# EAGLE board sx1509-breakout_mount (EAGLE 9.1.3)
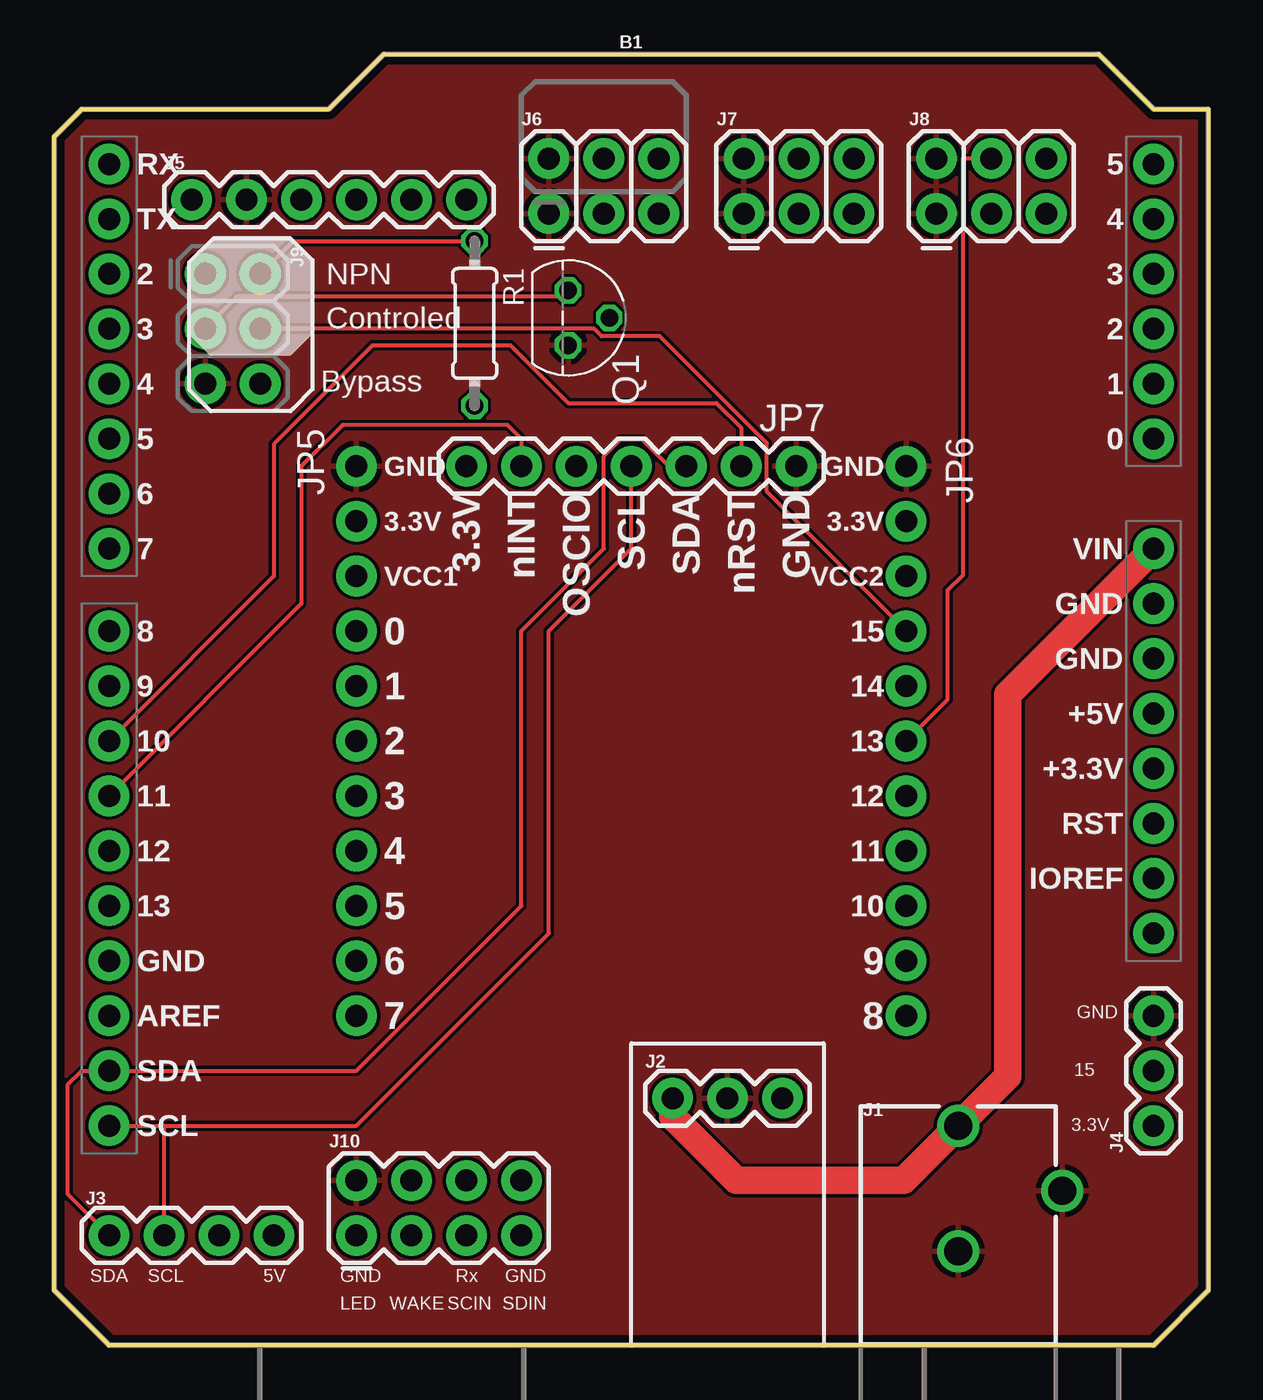
[diagram p0: board, top side]
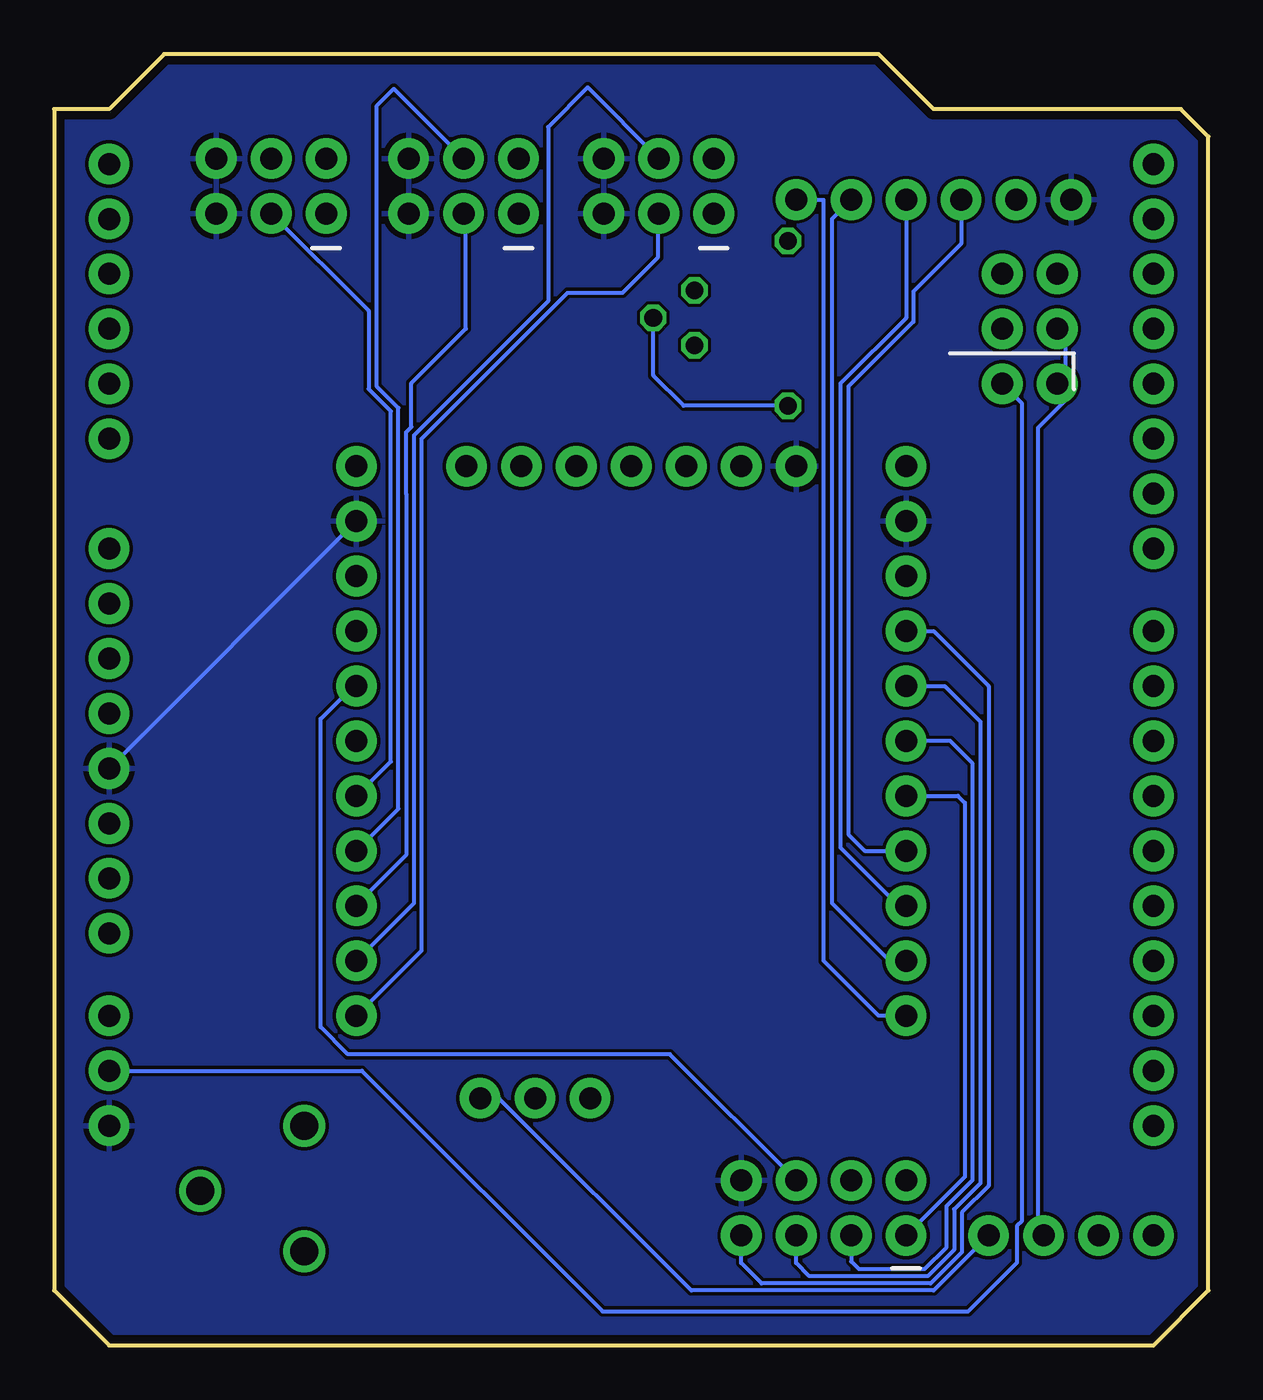
[diagram p1: board, bottom side, seen from below]

Size 53.34 x 59.69 mm. Coordinates in mm from the lower left corner, seen from the top.
Outline: 0,2.54 0,55.88 1.27,57.15 12.7,57.15 15.24,59.69 48.26,59.69 50.8,57.15 53.34,57.15 53.34,2.54 50.8,0 2.54,0 0,2.54
Copper layers (1*16): Top 0.035559375mm / dielectric 1.6mm / Bottom 0.035559375mm
Design rules "oshpark-2layer": minimum track width 6mil, minimum drill 10mil, track to track 6mil, track to pad 6mil, pad to pad 6mil, via to via 6mil, smd to smd 6mil, copper to edge 15mil, drill to drill 6mil, minimum pad ring 5mil, minimum via ring 5mil, stop-mask expansion 2.5mil, vias tented up to drill 0mil, thermal gap 10mil

## Footprints (pad centres in the part's own frame; a part is rotated, then mirrored left to right if it is on the bottom)
UNO_R3_SHIELD = drill 1.016 pad 1.88: 3.3V 24.13,-2.54; 5V 24.13,0; A0 24.13,12.7; A1 24.13,15.24; A2 24.13,17.78; A3 24.13,20.32; A4 24.13,22.86; A5 24.13,25.4; AREF -24.13,-13.97; D2 -24.13,20.32; D3 -24.13,17.78; D4 -24.13,15.24; D5 -24.13,12.7; D6 -24.13,10.16; D7 -24.13,7.62; D8 -24.13,3.81; D9 -24.13,1.27; D10 -24.13,-1.27; D11 -24.13,-3.81; D12 -24.13,-6.35; D13 -24.13,-8.89; GND@0 24.13,2.54; GND@1 24.13,5.08; GND@2 -24.13,-11.43; IOREF 24.13,-7.62; NC 24.13,-10.16; RES 24.13,-5.08; RX -24.13,25.4; SCL -24.13,-19.05; SDA -24.13,-16.51; TX -24.13,22.86; VIN 24.13,7.62
POWER_JACK_PTH_BREAD = drill 1.3: GND 0,7.9; GNDBREAK 4.8,10.7; PWR 0,13.7
1X03 = drill 1.016 pad 1.88: 1 0,0; 2 2.54,0; 3 5.08,0
1X04 = drill 1.016 pad 1.88: 1 0,0; 2 2.54,0; 3 5.08,0; 4 7.62,0
1X06 = drill 1.016 pad 1.88: 1 0,0; 2 2.54,0; 3 5.08,0; 4 7.62,0; 5 10.16,0; 6 12.7,0
2X3 = drill 1.016 pad 1.88: 1 0,0; 2 0,2.54; 3 2.54,0; 4 2.54,2.54; 5 5.08,0; 6 5.08,2.54
2X3-NS = drill 1.016 pad 1.88: 1 -2.54,-1.27; 2 -2.54,1.27; 3 0,-1.27; 4 0,1.27; 5 2.54,-1.27; 6 2.54,1.27
2X4 = drill 1.016 pad 1.88: 1 -3.81,-1.27; 2 -3.81,1.27; 3 -1.27,-1.27; 4 -1.27,1.27; 5 1.27,-1.27; 6 1.27,1.27; 7 3.81,-1.27; 8 3.81,1.27
1X11_NO_SILK = drill 1.016 pad 1.88: 1 0,0; 2 2.54,0; 3 5.08,0; 4 7.62,0; 5 10.16,0; 6 12.7,0; 7 15.24,0; 8 17.78,0; 9 20.32,0; 10 22.86,0; 11 25.4,0
1X07 = drill 1.016 pad 1.88: 1 0,0; 2 2.54,0; 3 5.08,0; 4 7.62,0; 5 10.16,0; 6 12.7,0; 7 15.24,0
TO92 = drill 0.813 octagon: 1 1.27,0; 2 0,1.905; 3 -1.27,0
0204/7 = drill 0.813 octagon: 1 -3.81,0; 2 3.81,0

## Placement (x,y rotation side)
B1  ARDUINO_UNO_R3_SHIELDBASIC  [UNO_R3_SHIELD]  26.67,29.21 0 top
J1  Pi Power Jack  [POWER_JACK_PTH_BREAD]  41.78,-3.56 0 top
J2  12V to 5V  [1X03]  28.57,11.43 0 top
J3  Pi Connection  [1X04]  10.16,5.08 180 top
J4  [1X03]  50.8,10.16 90 top
J5  IR Sensors  [1X06]  6.35,52.96 0 top
J6  Switch A + B  [2X3]  22.86,52.32 0 top
J7  Switch C + D  [2X3]  31.88,52.32 0 top
J8  Switch E + F  [2X3]  40.77,52.32 0 top
J9  [2X3-NS]  8.26,46.99 270 top
J10  LED + Radio  [2X4]  17.78,6.35 0 top
JP5  [1X11_NO_SILK]  13.97,40.64 270 top
JP6  [1X11_NO_SILK]  39.37,40.64 270 top
JP7  [1X07]  34.29,40.64 180 top
Q1  BC337  [TO92]  23.75,47.5 270 top
R1  100  [0204/7]  19.43,47.24 270 top

## Library data of the parts
B1 = SparkFun-Boards
J1 = SparkFun-Connectors; PROD_ID: PRT-10811
J2 J4 J9 J10 JP5-JP7 = SparkFun-Connectors
J3 = SparkFun-Connectors; PROD_ID: CONN-09696
J5 = SparkFun-Connectors; PROD_ID: CONN-08437
J6-J8 = SparkFun-Connectors; PROD_ID: CONN-11566
Q1 = transistor-npn
R1 = eagle-ltspice; SPICEMODEL: NONE; SPICEPREFIX: R

## Nets
3.3V: B1.3.3V J4.1 J5.1 J6.5 J6.6 J7.5 J7.6 J8.5 J8.6 J10.8 JP5.2 JP6.2 JP7.7
4: J5.3 JP5.8
5: J5.4 JP5.9
5V: J2.3 J3.1
6: J5.5 JP5.10
7: J5.6 JP5.11
8: J6.3 JP6.11
9: J6.4 JP6.10
10: J7.3 JP6.9
11: J7.4 JP6.8
12: J8.3 JP6.7
12V: B1.VIN J1.PWR J2.1
13: J8.4 JP6.6
15: J9.4 JP6.4
GND: J1.GND J1.GNDBREAK J2.2 J4.3 J5.2 J6.1 J6.2 J7.1 J7.2 J8.1 J8.2 J9.5 J10.2 JP5.1 JP6.1 JP7.1 Q1.1
N$1: J3.2 J9.3 Q1.3
N$2: Q1.2 R1.2
N$3: J4.2 J9.6
N$4: J9.2 R1.1
NINT: B1.D11 JP7.6
NRESET: B1.D10 JP7.2
OSCIO: JP7.5
RXDATA: J10.6 JP6.5
SCIN: J10.5 JP5.5
SCL: B1.SCL J3.3 JP7.4
SDA: B1.SDA J3.4 JP7.3
SDIN: J10.7 JP5.4
VCC1: JP5.3
VCC2: JP6.3
WAKE_LED: J10.1 JP5.7
WAKE_SW: J10.3 JP5.6

## Tracks (layer width: path | path; a pad name or v marks a point on that pad's centre or on a via)
3.3V
  Bottom 0.178: B1.3.3V JP6.2
  pour Bottom: 0,55.88 1.27,57.15 12.7,57.15 15.24,59.69 48.26,59.69 50.8,57.15 53.34,57.15 53.34,2.54 50.8,0 2.54,0 0,2.54
4
  Bottom 0.178: J5.3 11.43,50.93 13.64,48.72 13.64,47.32 16.64,44.32 16.64,23.62 15.88,22.86 JP5.8
5
  Bottom 0.178: JP5.9 14.31,20.32 16.99,23 16.99,44.47 13.97,47.49 J5.4
5V
  Bottom 0.178: J3.1 12.7,2.54 23.89,2.54 32.78,11.43 J2.3
6
  Bottom 0.178: J5.5 17.4,52.07 17.4,20.45 14.73,17.78 JP5.10
7
  Bottom 0.178: JP5.11 15.24,15.24 17.78,17.78 17.78,52.96 J5.6
8
  Bottom 0.178: J6.3 25.43,52.3 25.43,50.3 27.07,48.66 29.61,48.66 36.36,41.91 36.36,18.25 JP6.11
9
  Bottom 0.178: JP6.10 36.72,20.43 36.72,42.06 30.52,48.26 30.52,56.31 28.68,58.15 J6.4
10
  Bottom 0.178: J7.3 34.31,52.22 34.31,46.99 36.83,44.48 36.83,42.45 37.07,42.21 37.07,40.27 37.07,39.37 37.07,22.67 39.37,20.37 JP6.9
11
  Bottom 0.178: JP6.8 37.43,24.8 37.43,43.33 38.45,44.35 38.45,57.27 37.64,58.09 J7.4
12
  Bottom 0.178: JP6.7 37.78,26.99 37.78,43.18 38.81,44.2 38.81,47.82 J8.3
12V
  Top 1.27: J2.1 28.57,10.56 31.51,7.62 39.26,7.62 J1.PWR 44.07,12.43 44.07,30.1 B1.VIN
13
  Top 0.178: JP6.6 41.29,29.86 41.29,34.91 42,35.62 42,54.86 J8.4
15
  Top 0.178: J9.4 24.96,46.99 25.3,46.65 27.99,46.65 32.93,41.7 32.93,39.46 JP6.4
GND
  pour Top: 0,55.88 1.27,57.15 12.7,57.15 15.24,59.69 48.26,59.69 50.8,57.15 53.34,57.15 53.34,2.54 50.8,0 2.54,0 0,2.54
N$1
  Top 0.178: J9.3 8.47,48.48 23.46,48.48 Q1.3
  Bottom 0.178: J3.2 7.87,5.33 7.87,42.42 6.6,43.69 6.6,46.61 J9.3
N$2
  Bottom 0.178: R1.2 24.26,43.43 25.65,44.83 Q1.2
N$3
  Bottom 0.178: J4.2 39.12,12.7 27.99,1.57 11.11,1.57 8.85,3.83 8.85,5.52 8.64,5.73 8.64,43.56 J9.6
N$4
  Top 0.178: J9.2 11.05,51.05 R1.1
NINT
  Top 0.178: B1.D11 11.43,34.29 11.43,40.64 13.34,42.55 20.95,42.55 21.59,41.91 JP7.6
NRESET
  Top 0.178: B1.D10 10.16,35.56 10.16,41.66 14.73,46.23 21.08,46.23 23.75,43.56 30.61,43.56 31.75,42.42 JP7.2
RXDATA
  Bottom 0.178: J10.6 24.89,13.46 39.77,13.46 41.02,14.71 41.02,28.96 39.5,30.48 JP6.5
SCIN
  Bottom 0.178: J10.5 19.05,3.81 18.44,3.2 12.97,3.2 11.75,4.43 11.75,6.3 10.54,7.5 10.54,28.83 12.19,30.48 JP5.5
SCL
  Top 0.178: J3.3 5.08,10.16 | B1.SCL 5.08,10.16 | 5.08,10.16 13.97,10.16 22.86,19.05 22.86,33.02 26.67,36.83 JP7.4
SDA
  Top 0.178: JP7.3 28.41,40.64 27.18,41.87 26.16,41.87 25.4,41.11 25.4,36.83 21.59,33.02 21.59,20.32 13.97,12.7 B1.SDA 1.27,12.7 0.64,12.06 0.64,6.99 J3.4
SDIN
  Bottom 0.178: J10.7 21.59,3.81 20.65,2.87 12.84,2.87 11.39,4.32 11.39,6.15 10.16,7.38 10.16,30.48 12.7,33.02 JP5.4
WAKE_LED
  Bottom 0.178: JP5.7 11.58,25.4 11.25,25.07 11.25,7.8 J10.1
WAKE_SW
  Bottom 0.178: JP5.6 11.94,27.94 10.9,26.9 10.9,7.65 12.1,6.44 12.1,4.54 13.11,3.53 16.15,3.53 16.51,3.89 J10.3

## Text on the board
tPlace: NPN / Controled | Bypass | GND | GND | 3.3V | nINT | OSCIO | SCL | SDA | nRST | GND | 3.3V | 3.3V | VCC1 | VCC2 | 0 | 15 | 1 | 14 | 2 | 13 | 3 | 12 | 4 | 11 | 5 | 10 | 6 | 9 | 7 | 8 | GND | 15 | 3.3V | SDA | SCL | 5V | GND | Rx | GND | LED | WAKE | SCIN | SDIN